# EAGLE board Atemfrequenzmesser_Board_V2 (EAGLE 9.6.2)
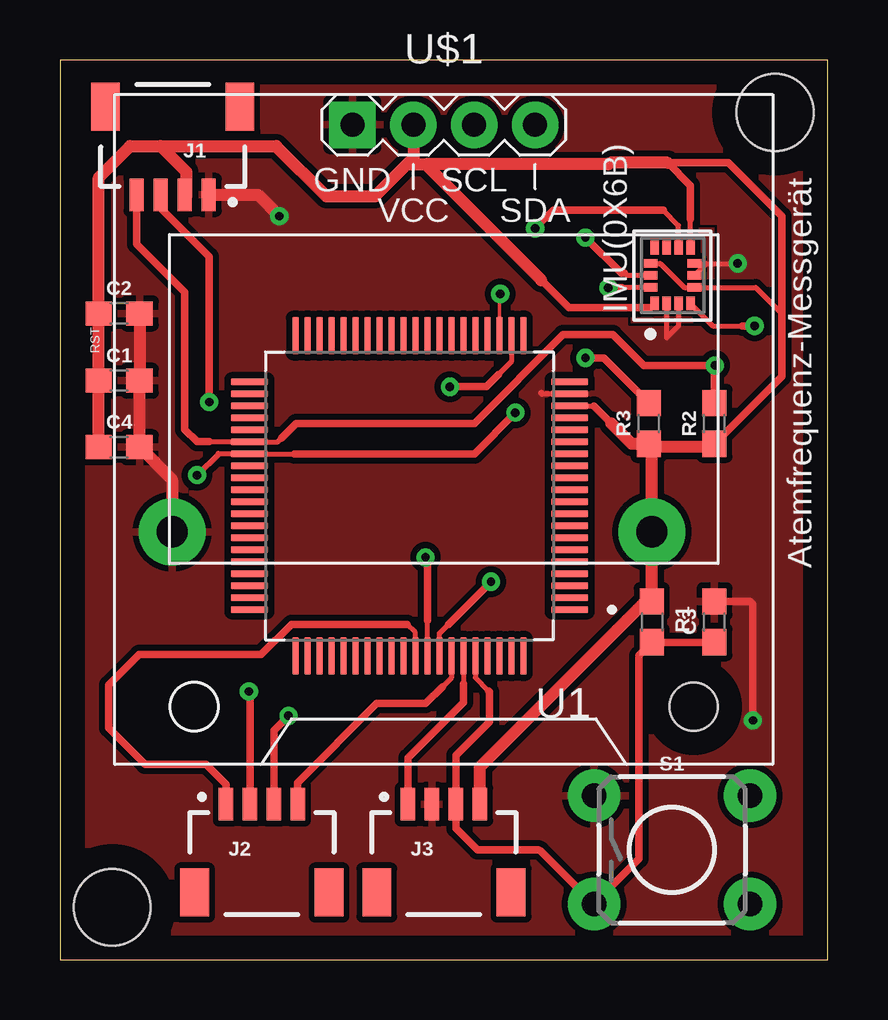
[diagram p0: board, top side]
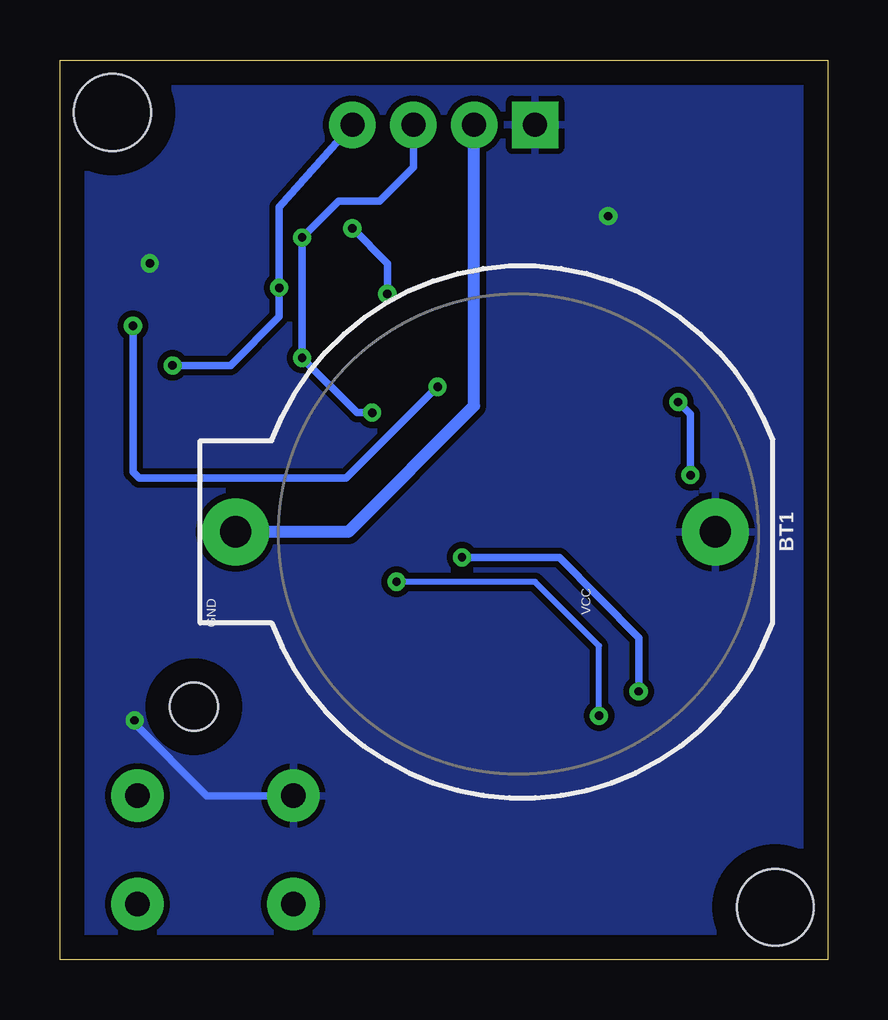
[diagram p1: board, bottom side, seen from below]

Size 32 x 37.5 mm. Coordinates in mm from the lower left corner, seen from the top.
Outline: 0,0 32,0 32,37.5 0,37.5 0,0
Copper layers (1*16): Top 0.035mm / dielectric 1.5mm / Bottom 0.035mm
Design rules "default *": minimum track width 6mil, minimum drill 0.35mm, track to track 10mil, track to pad 10mil, pad to pad 5mil, via to via 10mil, smd to smd 6mil, copper to edge 40mil, drill to drill 6mil, minimum pad ring 10mil, minimum via ring 8mil, stop-mask expansion 4mil, vias tented up to drill 0mil, thermal gap 10mil
Net classes: 0 default: width 0 mm, drill 0 mm
Holes 3.2 mm at 2.18,2.18 29.82,35.31

## Footprints (pad centres in the part's own frame; a part is rotated, then mirrored left to right if it is on the bottom)
BATTCOM_20MM_PTH = drill 1.3 pad 2.794: 1 11.85,0; 2 -8.15,0
0603 = smd 1.1 x 1: 1 -0.85,0; 2 0.85,0
STMICROELECTRONICS_LSM6DSO32TR_0 = smd 0.575 x 0.35: 1 -1.162,0.75; 2 -1.162,0.25; 3 -1.162,-0.25; 4 -1.162,-0.75; 8 1.162,-0.75; 9 1.162,-0.25; 10 1.162,0.25; 11 1.162,0.75 | smd 0.35 x 0.575: 5 -0.5,-0.912; 6 0,-0.912; 7 0.5,-0.912; 12 0.5,0.912; 13 0,0.912; 14 -0.5,0.912 | smd 0.529 x 0.304: SMD_15 -1.162,0.75; SMD_16 -1.162,0.25; SMD_17 -1.162,-0.25; SMD_18 -1.162,-0.75; SMD_19 1.162,-0.75; SMD_20 1.162,-0.25; SMD_21 1.162,0.25; SMD_22 1.162,0.75 | smd 0.304 x 0.529: SMD_23 -0.5,-0.912; SMD_24 0,-0.912; SMD_25 0.5,-0.912; SMD_26 0.5,0.912; SMD_27 0,0.912; SMD_28 -0.5,0.912
JST04_1MM_RA = smd 0.6 x 1.35: 1 -1.5,0; 2 -0.5,0; 3 0.5,0; 4 1.5,0 | smd 1.2 x 2: NC1 2.8,-3.675; NC2 -2.8,-3.675
TACTILE_SWITCH_PTH_6.0MM = drill 1.016 pad 2.184: 1 -3.251,2.261; 2 3.251,2.261; 3 -3.251,-2.261; 4 3.251,-2.261
QFP50P1400X1400X160-80N = smd 1.56 x 0.28: 1 -6.68,4.75; 2 -6.68,4.25; 3 -6.68,3.75; 4 -6.68,3.25; 5 -6.68,2.75; 6 -6.68,2.25; 7 -6.68,1.75; 8 -6.68,1.25; 9 -6.68,0.75; 10 -6.68,0.25; 11 -6.68,-0.25; 12 -6.68,-0.75; 13 -6.68,-1.25; 14 -6.68,-1.75; 15 -6.68,-2.25; 16 -6.68,-2.75; 17 -6.68,-3.25; 18 -6.68,-3.75; 19 -6.68,-4.25; 20 -6.68,-4.75; 41 6.68,-4.75; 42 6.68,-4.25; 43 6.68,-3.75; 44 6.68,-3.25; 45 6.68,-2.75; 46 6.68,-2.25; 47 6.68,-1.75; 48 6.68,-1.25; 49 6.68,-0.75; 50 6.68,-0.25; 51 6.68,0.25; 52 6.68,0.75; 53 6.68,1.25; 54 6.68,1.75; 55 6.68,2.25; 56 6.68,2.75; 57 6.68,3.25; 58 6.68,3.75; 59 6.68,4.25; 60 6.68,4.75 | smd 0.28 x 1.56: 21 -4.75,-6.68; 22 -4.25,-6.68; 23 -3.75,-6.68; 24 -3.25,-6.68; 25 -2.75,-6.68; 26 -2.25,-6.68; 27 -1.75,-6.68; 28 -1.25,-6.68; 29 -0.75,-6.68; 30 -0.25,-6.68; 31 0.25,-6.68; 32 0.75,-6.68; 33 1.25,-6.68; 34 1.75,-6.68; 35 2.25,-6.68; 36 2.75,-6.68; 37 3.25,-6.68; 38 3.75,-6.68; 39 4.25,-6.68; 40 4.75,-6.68; 61 4.75,6.68; 62 4.25,6.68; 63 3.75,6.68; 64 3.25,6.68; 65 2.75,6.68; 66 2.25,6.68; 67 1.75,6.68; 68 1.25,6.68; 69 0.75,6.68; 70 0.25,6.68; 71 -0.25,6.68; 72 -0.75,6.68; 73 -1.25,6.68; 74 -1.75,6.68; 75 -2.25,6.68; 76 -2.75,6.68; 77 -3.25,6.68; 78 -3.75,6.68; 79 -4.25,6.68; 80 -4.75,6.68
DISPLAY-OLED-128X64-I2C = drill 1 pad 1.93 square: 1 -3.81,12.7 | drill 1 pad 1.93: 2 -1.27,12.7; 3 1.27,12.7; 4 3.81,12.7 | hole 2: 10.414,-11.557

## Placement (x,y rotation side)
BT1  3.3V  [BATTCOM_20MM_PTH]  12.83,17.83 180 bottom
C1  10uF  [0603]  2.46,24.13 0 top
C2  100nF  [0603]  2.46,26.93 0 top
C3  2.2nF  [0603]  27.29,14.08 90 top
C4  100nF  [0603]  2.46,21.36 0 top
IMU(0X6B)  STMICROELECTRONICS_LSM6DSO32TRSTMICROELECTRONICS_LSM6DSO32TR_0_0  [STMICROELECTRONICS_LSM6DSO32TR_0]  25.54,28.51 90 top
J1  IMU-2  [JST04_1MM_RA]  4.7,31.88 180 top
J2  JTAG1  [JST04_1MM_RA]  8.42,6.48 0 top
J3  JTAG2  [JST04_1MM_RA]  16.01,6.48 0 top
R1  47k  [0603]  24.67,14.08 270 top
R2  10k  [0603]  27.29,22.35 90 top
R3  10k  [0603]  24.55,22.35 90 top
S1  [TACTILE_SWITCH_PTH_6.0MM]  25.52,4.57 0 top
U1  MSP430F5525IPNR  [QFP50P1400X1400X160-80N]  14.57,19.33 180 top
U$1  DISPLAY-OLED-128X64-I2C  [DISPLAY-OLED-128X64-I2C]  16,22.1 0 top

## Library data of the parts
BT1 = SparkFun-Batteries1; PROD_ID: BATT-09031; SF_SKU: PRT-00783
C1-C4 = SparkFun-Capacitors; PROD_ID: CAP-07879
IMU(0X6B) = STMicroelectronics - LSM6DSO32TR; ACCEL_RANGE: 4/8/16/32g; AUTOMOTIVE: No; CENTROID_NOT_SPECIFIED: No; DATASHEET: https://eu.mouser.com/datasheet/2/389/dm00603953-1862087.pdf; DEVICE_CLASS_L1: Sensors; DEVICE_CLASS_L2: Motion Sensors; DEVICE_CLASS_L3: Inertial Measurement Units (IMUs); DIGIKEY_DESCRIPTION: INEMO INERTIAL MODULE: 3D ACCELE; DIGIKEY_PART_NUMBER: 497-LSM6DSO32CT-ND; FOOTPRINT_VARIANT_NAME_0: Recommended_Land_Pattern; HEIGHT: 0.86mm; LEAD_FREE: Yes; MAX_SUPPLY_VOLTAGE: 3.6V; MF: STMicroelectronics; MFG_PACKAGE_IDENT: LGA-14L-DM00249496; MFG_PACKAGE_IDENT_COMPONENT_ID: 648051b55531c14c; MFG_PACKAGE_IDENT_DATE: 0; MFG_PACKAGE_IDENT_REV: 1; MIN_SUPPLY_VOLTAGE: 1.62V; MOUSER_DESCRIPTION: Accelerometer and 3D Gyroscope 3D Always-On 1.71V to 3.6V 0.55mA 14-Pin LGA T/R; MOUSER_PART_NUMBER: 511-LSM6DSO32TR; MPN: LSM6DSO32TR; OPERATING_SUPPLY_CURRENT: 0.55mA; PACKAGE: LGA14; PREFIX: U; RESOLUTION: 16bits; ROHS: Yes; SENSOR_OUTPUT: I2C,SPI; SENSOR_TYPE: Temperature,Accelerometer,Gyroscope; TEMPERATURE_RANGE_HIGH: +85°C; TEMPERATURE_RANGE_LOW: -40°C; VERIFICATION_VERSION: 0.0.0.3
J1-J3 = SparkFun-Connectors; PROD_ID: CONN-13694
R1-R3 = SparkFun-Resistors; PROD_ID: RES-07856
S1 = SparkFun-Switches1; PROD_ID: SWCH-08441; SF_SKU: COM-00097
U1 = MSP430F5519IPNR; AVAILABILITY: In Stock; DESCRIPTION: 25 MHz MCU with 128KB Flash, 8KB SRAM, Comparator, DMA, UART/SPI/I2C, USB, Timer, HW Multiplier 80-LQFP -40 to 85; MF: Texas Instruments; MP: MSP430F5519IPNR; PACKAGE: LQFP-80 Texas Instruments; PRICE: None; PURCHASE-URL: https://pricing.snapeda.com/search/part/MSP430F5519IPNR/?ref=eda
U$1 = ahmet

## Nets
AVCC1: U1.11
AVSS1: U1.14
AVSS2: U1.68
DVCC2: U1.50
DVSS2: U1.49
GND: BT1.2 C1.2 C2.2 C3.2 C4.2 IMU(0X6B).2 IMU(0X6B).3 IMU(0X6B).6 IMU(0X6B).7 J1.1 J3.2 S1.1 U1.19 U$1.1
INT1: IMU(0X6B).4 U1.22
INT2: IMU(0X6B).9 U1.23
RST: C3.1 J3.3 R1.2 S1.3 U1.76
SCL: IMU(0X6B).13 J1.3 R3.2 U1.47 U$1.3
SDA: IMU(0X6B).14 J1.4 R2.2 U1.46 U$1.4
TCK: J3.1 U1.75
TDI: J2.3 U1.73
TDO: J2.2 U1.72
TEST: J2.1 U1.71
TMS: J2.4 U1.74
V18: U1.67
VCC: BT1.1 C1.1 C2.1 C4.1 IMU(0X6B).1 IMU(0X6B).5 IMU(0X6B).8 IMU(0X6B).12 J1.2 J3.4 R1.1 R2.1 R3.1 U1.18 U$1.2
VCORE: U1.20
VSSU: U1.61

## Tracks (layer width: path | path; a pad name or v marks a point on that pad's centre or on a via)
GND  (via drill 0.35)
  Top 0.203: U1.19 20.11,23.58 | IMU(0X6B).3 25.79,26.42 25.29,25.92 IMU(0X6B).2 | IMU(0X6B).7 26.95,29.01 | 26.95,29.01 v28.25,29.01 v28.26,29.02 | IMU(0X6B).6 26.95,29.01
  Top 0.254: 20.11,23.58 20.07,23.62
  Top 0.305: C3.2 28.76,14.93 28.89,14.8 v28.89,9.97
  Top 0.508: C2.2 C1.2 C4.2 4.68,19.99 BT1.2 | J1.1 8.26,31.88 v9.14,30.99
  Bottom 0.305: v28.89,9.97 28.89,9.84 25.88,6.83 S1.1
  pour Top: -4.06,37.55 -4.06,-1.02 -0.71,-4.37 31.14,-4.37 35.94,0.43 35.94,37.67 32.41,41.2 -0.42,41.2
  pour Bottom: -2.74,45.42 -8.66,39.5 -8.66,-3.53 -3.45,-8.74 33.12,-8.74 40.36,-1.5 40.36,39.93 34.87,45.42
INT1  (via drill 0.35)
  Top 0.203: IMU(0X6B).4 27.22,26.42 28.45,26.42 | U1.22 18.82,24.92 18.29,24.38
  Top 0.305: v28.96,26.42 28.45,26.42 | 18.29,24.38 17.78,23.88 v16.26,23.88
  Bottom 0.305: v28.96,26.42 28.96,20.32 28.7,20.07 20.07,20.07 v16.26,23.88
INT2  (via drill 0.35)
  Top 0.152: U1.23 18.32,27.72 v18.35,27.75
  Top 0.203: IMU(0X6B).9 25.79,30.6 25.15,31.24
  Top 0.305: 25.15,31.24 20.57,31.24 v19.81,30.48
  Bottom 0.305: v19.81,30.48 18.35,29.02 v18.35,27.75
RST
  Top 0.203: U1.76 17.32,11.75 17.87,11.2
  Top 0.305: C3.1 R1.2 24.13,12.68 24.13,4.19 22.27,2.33 S1.3 20.04,4.54 19.96,4.57 17.4,4.57 16.51,5.46 J3.3 16.51,8.51 17.91,9.91 17.91,11.16 17.87,11.2
SCL  (via drill 0.35)
  Top 0.203: 9.78,21.08 U1.47 6.61,21.08 | IMU(0X6B).13 23.62,28.51 23.53,28.61
  Top 0.254: 9.78,21.08 | 6.61,21.08 v5.71,20.19
  Top 0.305: R3.2 22.67,25.08 v21.91,25.08 | 9.78,21.08 17.27,21.08 v18.99,22.8 | J1.3 4.17,31.85 4.17,31.35 6.22,29.3 v6.22,23.24 | 23.53,28.61 23.4,28.61 v21.91,30.1
  Bottom 0.305: v6.22,23.24 5.71,22.73 v5.71,20.19 | v18.99,22.8 19.62,22.8 v21.91,25.08 v21.91,30.1 20.38,31.62 18.67,31.62 17.27,33.03 17.27,33.05 U$1.3
SDA  (via drill 0.35)
  Top 0.203: 6.23,21.58 U1.46 9.07,21.58 9.24,21.75 | IMU(0X6B).14 23.43,28
  Top 0.254: 6.23,21.58 6.22,21.59
  Top 0.305: 27.29,24.75 R2.2 | v27.3,24.77 24.35,24.77 23.06,26.06 20.98,26.06 17.27,22.35 9.84,22.35 9.24,21.75 | J1.4 3.2,29.82 5.21,27.81 5.21,22.1 5.71,21.59 6.22,21.59 | 23.43,28 v22.86,28
  Top 0.406: v27.3,24.77 27.29,24.75
  Bottom 0.305: v27.3,24.77 24.89,24.77 22.86,26.8 v22.86,28 22.86,31.37 U$1.4
TCK
  Top 0.203: U1.75 16.82,11.5
  Top 0.305: 16.82,11.5 16.82,10.72 14.51,8.41 J3.1
TDI  (via drill 0.35)
  Top 0.203: U1.73 15.82,13.6 16.19,13.97
  Top 0.305: J2.3 8.92,9.55 v9.53,10.16 | 16.19,13.97 v17.97,15.75
  Bottom 0.254: v9.53,10.16 9.53,13.08 12.19,15.75 v17.97,15.75
TDO  (via drill 0.35)
  Top 0.203: U1.72 15.32,14.14
  Top 0.305: v7.87,11.18 7.92,11.13 J2.2 | v15.24,16.76 15.32,16.68 15.32,14.14
  Bottom 0.305: v7.87,11.18 7.87,13.4 11.18,16.76 v15.24,16.76
TEST
  Top 0.203: U1.71 14.82,13.63 14.48,13.97
  Top 0.305: 14.48,13.97 9.65,13.97 8.39,12.71 3.29,12.71 2.02,11.44 2.02,9.66 3.55,8.13 6.1,8.13 6.92,7.31 J2.1
TMS
  Top 0.203: U1.74 16.32,11.75 15.94,11.37
  Top 0.305: J2.4 9.91,6.49 9.91,7.37 13.21,10.67 15.24,10.67 15.94,11.37
VCC
  Top 0.203: IMU(0X6B).12 25.02,29.01 26.02,28.01 IMU(0X6B).5 29,28.01 30.09,26.92 | U1.18 22.26,23.08 | IMU(0X6B).1 24.61,27.18 | IMU(0X6B).8 26.29,30.86
  Top 0.305: 22.26,23.08 22.99,22.35 | 24.61,27.18 21.21,27.18 20.07,28.32 | 26.29,30.86 26.29,32.27 25.34,33.21 27.87,33.21 30.09,30.99 30.09,26.92 30.09,24.31 R2.1
  Top 0.508: 25.34,33.21 22.93,33.21 22.86,33.15 15.24,33.15 | 24.68,21.37 BT1.1 R1.1 24.41,14.93 17.51,8.02 J3.4 | 24.68,21.37 R3.1 23.84,21.5 22.99,22.35 | R2.1 27.16,21.37 24.68,21.37 | J1.2 5.26,31.81 5.26,32.84 4.19,33.91 | C4.1 C1.1 C2.1 1.61,32.6 2.92,33.91 4.19,33.91 | 4.19,33.91 9.02,33.91 11.11,31.81 13.14,31.81 14.48,33.15 | 14.48,33.15 15.24,33.15 | 20.07,28.32 15.24,33.15 | U$1.2 14.73,33.4 14.48,33.15
  Bottom 0.508: BT1.1 19.98,17.83 14.73,23.08 U$1.2

## Text on the board
tNames: Atemfrequenz-Messgerät | RST
bNames: GND | VCC